# Altium PCB CT310高端控制盒核心板电路V1.3.PcbDoc (part 7 of 10)
Units mil, origin at the board's own origin, x right, y up, seen from the top; angles counter-clockwise.
Board outline 3735.76 x 4625 mil, 2 copper layers (TOP, BOTTOM), stack 10.4 mil thick; 198 components, 362 nets, 1085 pads, 352 vias.
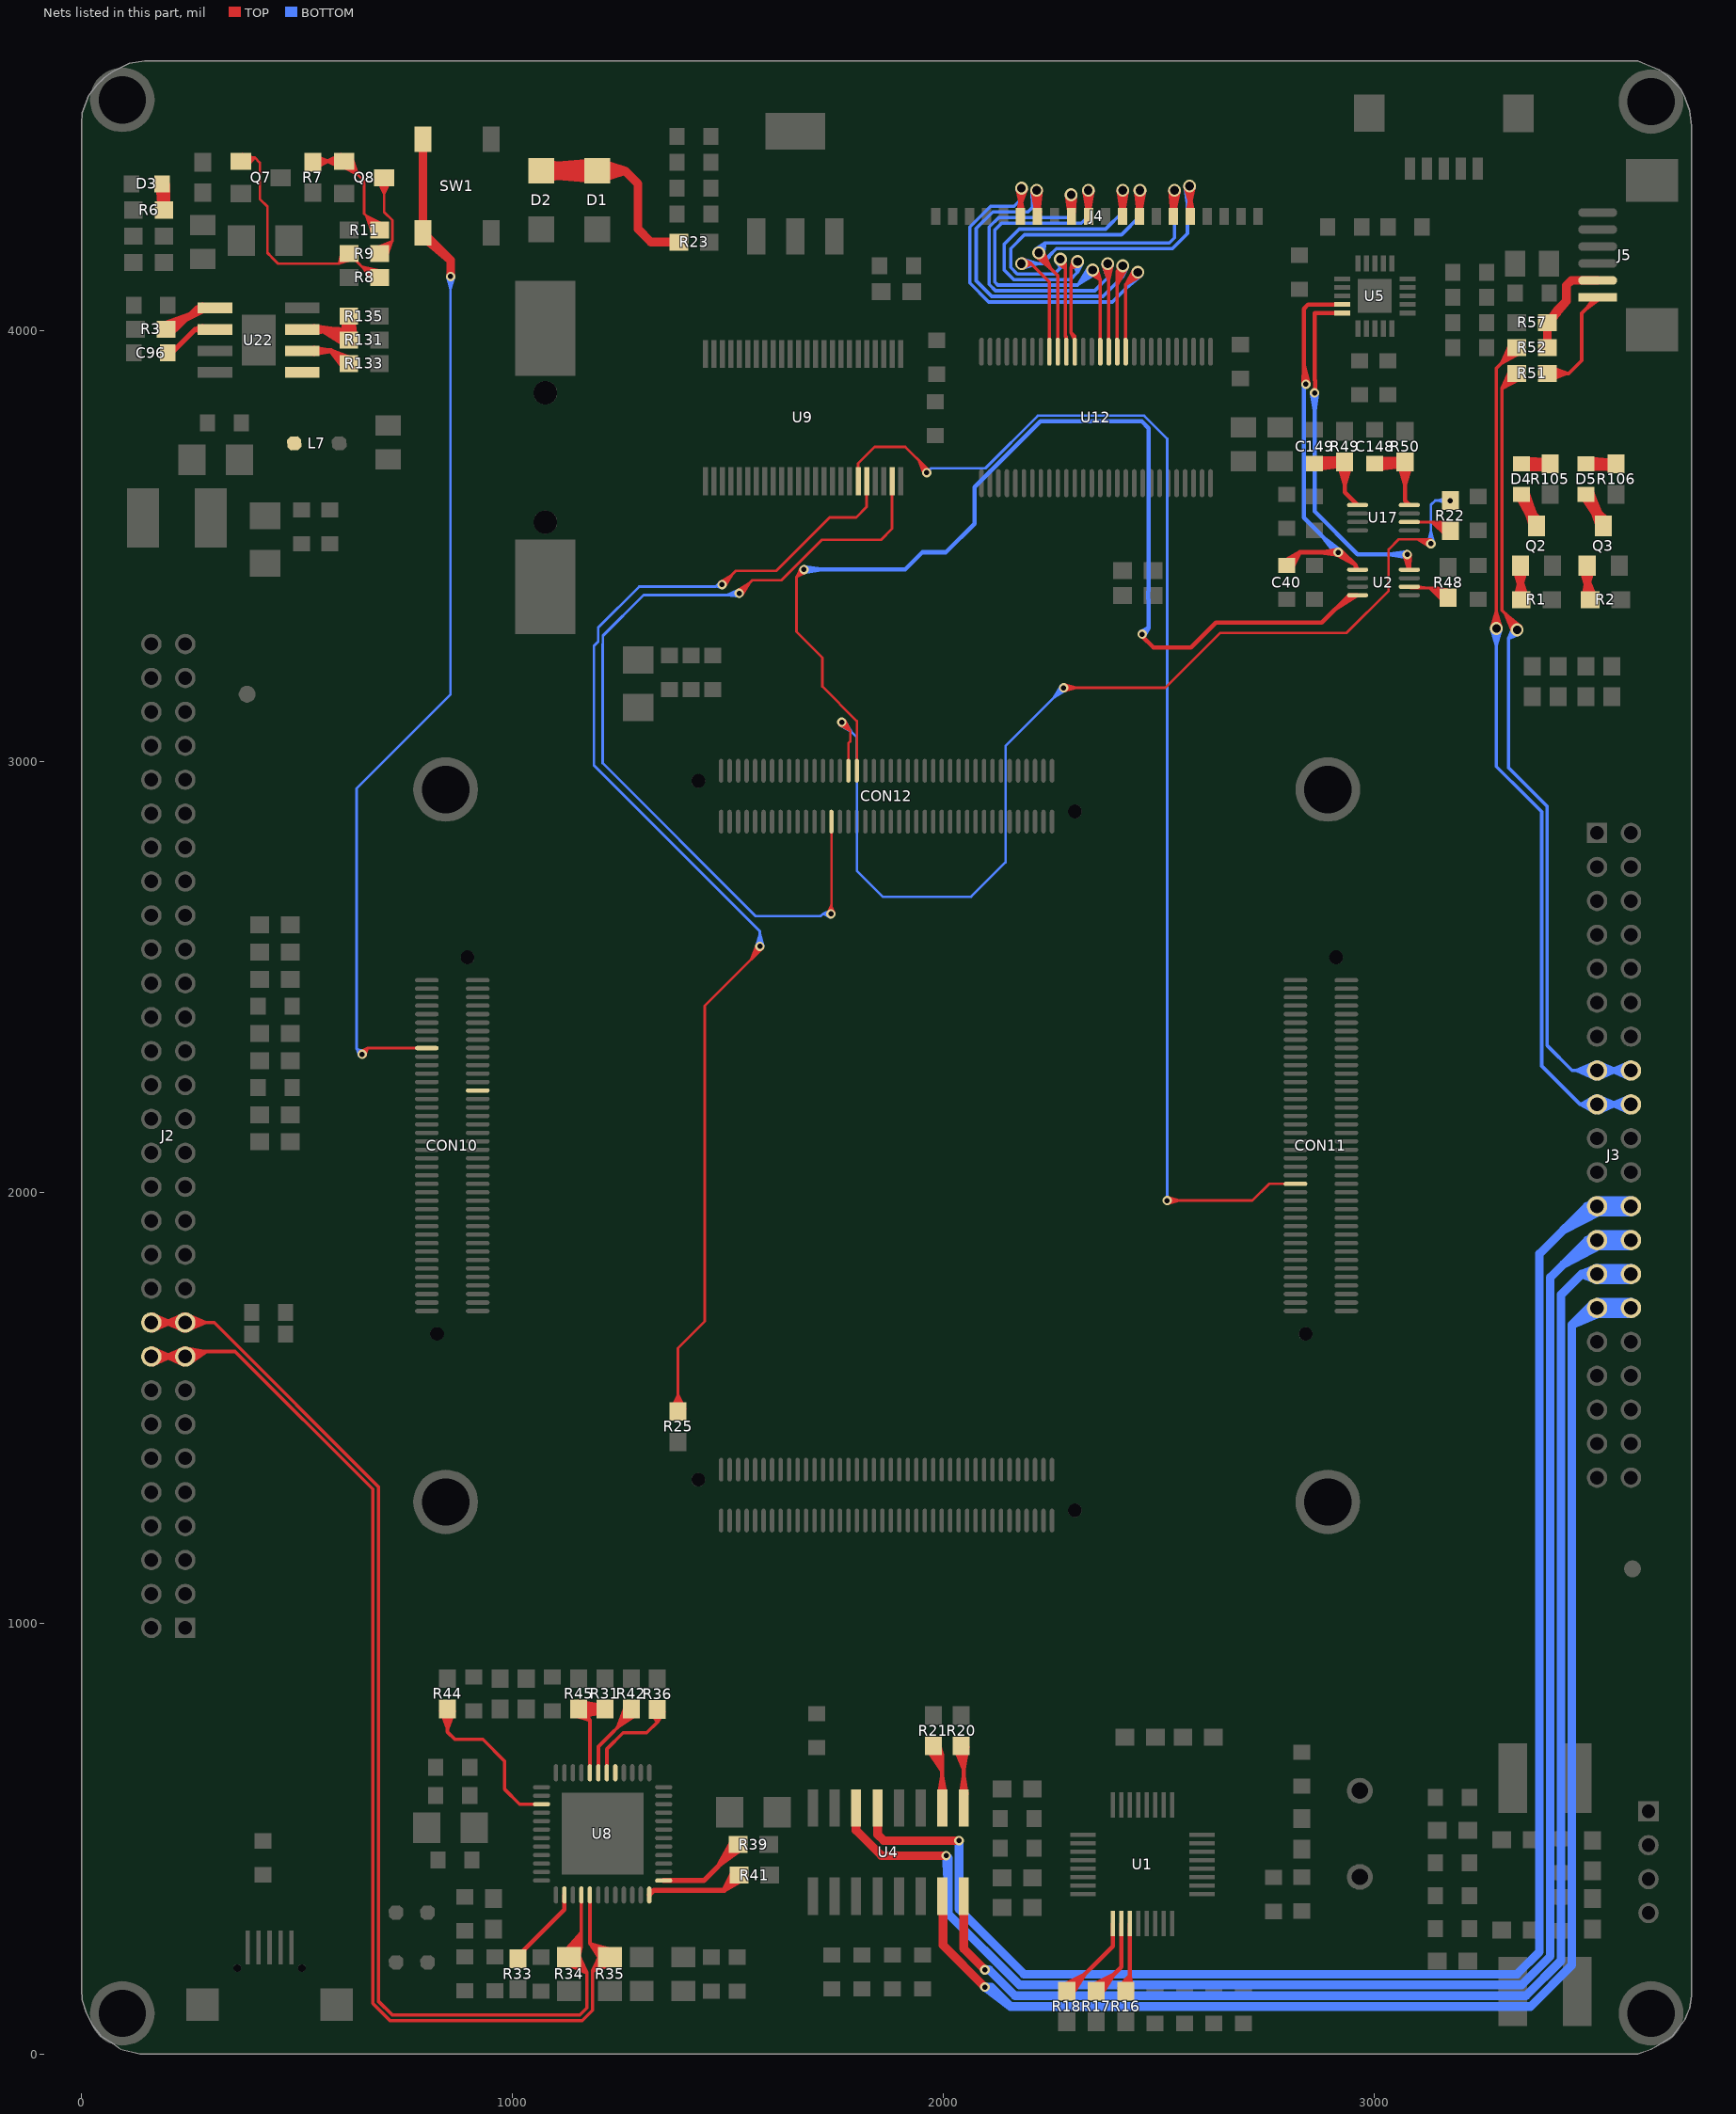
[diagram p7: the nets of this part, all layers, seen from the top]

## Via types
v1: diameter 22, hole 12, TOP to BOTTOM, tented both sides, 177 vias
v2: diameter 22, hole 12, TOP to BOTTOM, 89 vias
v3: diameter 28, hole 16, TOP to BOTTOM, 37 vias
v4: diameter 30, hole 20, TOP to BOTTOM, tented both sides, 26 vias
v5: diameter 24, hole 12, TOP to BOTTOM, 17 vias
v6: diameter 50, hole 30, TOP to BOTTOM, tented both sides, 5 vias
v7: diameter 40, hole 24, TOP to BOTTOM, 1 vias

## Nets (pads, with @x,y where several pads share a name; then routed paths per layer and width w, separated by ;. In a path a pad name is that pad's centre, name@x,y a point inside that pad or via, vN(x,y) a via of type N, cw(c..) or ccw(c..) an arc to the next point about the centre after c; other vN are vias at no path point) (continued)
NetC96_1: C96.1 U22.2 | length 192.9
  TOP w12: C96.1@192.19,3947.85 C96.1@195.87,3951.54 ; C96.1@199.56,3947.85 208.61,3947.85 263.11,4002.35 ; U22.2@280.49,3995.95 263.11,4002.35 ; U22.2@280.49,4008.75 263.11,4002.35 ; U22.2@281.63,4002.35 263.11,4002.35 ; U22.2@309.13,4002.35 263.11,4002.35
NetC148_1: C148.1 R50.1 U17.8 | length 1219.3
  TOP w10: C148.1@3000.76,3690.63 3066.82,3690.63 R50.1@3070.76,3694.57 3070.76,3604.57 U17.8@3080.8,3594.53 ; C148.1@3001.64,3703.3 R50.1@3051.15,3701.16 ; C148.1@3002.33,3677.92 3050.95,3682.76 ; C148.1@3004.11,3703.27 3050.46,3691.8 ; C148.1@3004.42,3678.03 3050.44,3690.63 ; C148.1@3004.42,3703.23 3050.44,3690.63 ; C148.1@3004.73,3678.07 3050.46,3691.8 ; C148.1@3006.39,3702.81 3050.95,3682.76 ; C148.1@3007,3678.65 R50.1@3051.15,3701.16 ; R50.1@3056.24,3690.43 3070.76,3642.91 ; R50.1@3068.03,3707.03 3020.82,3690.63 ; R50.1@3069.18,3678 3020.82,3690.63 ; R50.1@3085.28,3690.43 3070.76,3642.91 ; C148.1@3002.73,3690.63 3020.82,3690.63 ; C148.1@3002.73,3690.63 3050.46,3691.8 ; C148.1@3002.73,3690.63 3020.82,3690.63 ; C148.1@3002.73,3690.63 R50.1@3051.15,3701.16 ; C148.1@3002.73,3690.63 3020.82,3690.63 ; C148.1@3002.73,3690.63 3050.95,3682.76 ; C148.1@3002.73,3690.63 3050.44,3690.63 ; C148.1@3007.2,3678.72 3020.82,3690.63 ; C148.1@3007.2,3678.72 3020.82,3690.63 ; C148.1@3007.2,3678.72 3020.82,3690.63 ; C148.1@3007.2,3702.54 3020.82,3690.63 ; C148.1@3007.2,3702.54 3020.82,3690.63 ; C148.1@3007.2,3702.54 3020.82,3690.63 ; 3020.82,3690.63 3070.76,3692.6 3070.76,3642.91
NetC149_1: C149.1 R49.1 U17.1 | length 1028.3
  TOP w10: C149.1@2860.76,3690.63 2864.7,3694.57 R49.1@2930.76,3694.57 2930.76,3624.49 U17.1@2960.72,3594.53 2934.59,3620.67 ; C149.1@2861.05,3703.23 2909.65,3703.3 ; C149.1@2862.76,3677.91 R49.1@2914.38,3684.39 ; C149.1@2863.37,3703.33 2910.7,3694.57 ; C149.1@2865.43,3678.2 2910.7,3694.57 ; C149.1@2865.79,3702.97 R49.1@2914.38,3684.39 ; C149.1@2867.62,3678.89 2909.65,3703.3 ; R49.1@2916.24,3690.43 2930.76,3642.91 ; R49.1@2928.59,3680.04 2881.07,3694.57 ; R49.1@2928.59,3709.09 2881.07,3694.57 ; R49.1@2930.76,3692.6 2930.76,3642.91 ; R49.1@2945.28,3690.43 2930.76,3642.91 ; C149.1@2862.73,3690.63 2910.7,3694.57 ; C149.1@2862.73,3690.63 2881.07,3694.57 ; C149.1@2862.73,3690.63 2909.65,3703.3 ; C149.1@2862.73,3690.63 2881.07,3694.57 ; C149.1@2862.73,3690.63 R49.1@2914.38,3684.39 ; 2881.07,3694.57 2869.45,3679.84 2881.07,3694.57 ; 2881.07,3694.57 2864.43,3703.23 2881.07,3694.57
NetD1_2: D1.2 D2.2 R23.2 | length 1776.3
  TOP w20: D2.2@1065.76,4370.49 D1.2@1195.76,4370.49 ; D2.2@1067.98,4350.61 1155.76,4370.49 ; D2.2@1067.98,4390.36 1155.76,4370.49 ; D1.2@1191.1,4351.04 1103.99,4382.21 ; D1.2@1191.1,4389.94 1103.99,4358.77 ; D1.2@1193.54,4350.61 1105.76,4370.49 D1.2@1193.54,4390.36 ; D1.2@1196.13,4350.49 1103.99,4358.77 ; D1.2@1196.13,4390.48 1103.99,4382.21 ; D1.2@1198.86,4350.73 1260.27,4370.49 ; D1.2@1198.86,4390.25 1260.27,4370.49 ; R23.2@1365.33,4205 1320.76,4205 ; R23.2@1383.36,4205 1320.76,4205 ; 1103.99,4358.77 D1.2@1195.76,4370.49 ; 1103.99,4382.21 D1.2@1195.76,4370.49 ; 1155.76,4370.49 D1.2@1195.76,4370.49 ; 1155.76,4370.49 1190.76,4389.85 1155.76,4370.49 ; 1155.76,4370.49 1190.76,4351.12 1155.76,4370.49 ; 1155.76,4370.49 D1.2@1195.76,4370.49 ; D1.2@1195.76,4370.49 1260.27,4370.49 ; 1260.27,4370.49 1290.76,4340 1290.76,4235 1320.76,4205
NetD3_1: D3.1 R6.1 | length 115.7
  TOP w30: D3.1@186.19,4338.03 R6.1@190.62,4279.28 D3.1@190.62,4336.06
NetD4_1: D4.1 R105.1 | length 820.4
  TOP w10: D4.1@3330.76,3686.5 3403.49,3686.5 R105.1@3407.43,3690.43 ; D4.1@3341.14,3677.82 R105.1@3389.56,3678.12 ; D4.1@3342.16,3703.14 R105.1@3393.67,3699.07 ; D4.1@3343.37,3677.73 R105.1@3390.57,3686.5 ; D4.1@3343.71,3677.75 R105.1@3391.93,3687.85 ; D4.1@3345.03,3702.94 R105.1@3391.93,3687.85 ; D4.1@3345.44,3702.86 R105.1@3390.57,3686.5 ; D4.1@3346.38,3678.25 R105.1@3393.67,3699.07 ; D4.1@3347.55,3702.2 R105.1@3389.56,3678.12 ; R105.1@3404.7,3702.89 D4.1@3357.47,3686.5 ; R105.1@3405.84,3673.87 D4.1@3357.47,3686.5 ; R105.1@3407.43,3688.46 D4.1@3357.47,3686.5 ; D4.1@3342.73,3690.43 R105.1@3390.57,3686.5 ; D4.1@3342.73,3690.43 R105.1@3391.93,3687.85 ; D4.1@3342.73,3690.43 R105.1@3393.67,3699.07 ; D4.1@3342.73,3690.43 R105.1@3389.56,3678.12
NetD4_2: D4.2 Q2.3 | length 1167.5
  TOP w10: D4.2@3330.76,3615.63 3376.26,3570.13 ; D4.2@3330.89,3614.92 3354.18,3572.99 ; D4.2@3331.74,3613.17 3362.1,3573.66 ; D4.2@3332.92,3611.47 3370.76,3575.63 ; D4.2@3332.99,3611.4 3371.79,3575.02 ; D4.2@3354.13,3625.19 3371.79,3575.02 ; D4.2@3354.2,3625.05 3370.76,3575.63 ; D4.2@3354.98,3622.97 3362.1,3573.66 ; D4.2@3355.37,3620.94 3354.18,3572.99 ; Q2.3@3362.84,3544.23 3345.9,3600.49 ; Q2.3@3376.26,3546.25 3376.26,3570.13 ; Q2.3@3387.79,3559.29 3345.9,3600.49 ; D4.2@3331.57,3613.47 3345.9,3600.49 ; D4.2@3331.57,3613.47 3345.9,3600.49 ; D4.2@3331.57,3613.47 3345.9,3600.49 ; D4.2@3342.73,3619.57 3345.9,3600.49 ; D4.2@3342.73,3619.57 3362.1,3573.66 ; D4.2@3342.73,3619.57 3345.9,3600.49 ; D4.2@3342.73,3619.57 3371.79,3575.02 ; D4.2@3342.73,3619.57 3345.9,3600.49 ; D4.2@3342.73,3619.57 3354.18,3572.99 ; D4.2@3342.73,3619.57 3370.76,3575.63 ; 3345.9,3600.49 D4.2@3355.26,3617.42 ; 3345.9,3600.49 D4.2@3355.26,3617.42 ; 3345.9,3600.49 D4.2@3355.26,3617.42 ; 3345.9,3600.49 Q2.3@3376.26,3550.19 ; Q2.3@3376.26,3550.19 3376.26,3570.13 ; Q2.3@3376.26,3550.19 3376.26,3570.13 ; 3376.26,3570.13 3389.91,3555.59 3376.26,3570.13 ; 3376.26,3570.13 3362.61,3555.59 3376.26,3570.13
NetD5_1: D5.1 R106.1 | length 1044.2
  TOP w10: D5.1@3484.09,3686.5 3556.82,3686.5 R106.1@3560.76,3690.43 ; D5.1@3491.36,3677.79 3539.72,3678.95 ; D5.1@3492.41,3703.15 R106.1@3544.18,3698.08 ; D5.1@3493.37,3677.73 3540.59,3686.5 ; D5.1@3493.55,3677.74 R106.1@3560.76,3688.46 ; D5.1@3494.28,3703.05 R106.1@3560.76,3688.46 ; D5.1@3495.44,3702.86 3540.59,3686.5 ; D5.1@3496.12,3678.18 R106.1@3544.18,3698.08 ; D5.1@3497.35,3702.28 3539.72,3678.95 ; R106.1@3558.03,3702.89 3510.81,3686.5 ; R106.1@3559.18,3673.87 3510.81,3686.5 ; D5.1@3492.73,3690.43 3510.81,3686.5 ; D5.1@3492.73,3690.43 R106.1@3560.76,3688.46 ; D5.1@3492.73,3690.43 3510.81,3686.5 ; D5.1@3492.73,3690.43 R106.1@3544.18,3698.08 ; D5.1@3492.73,3690.43 3510.81,3686.5 ; D5.1@3492.73,3690.43 3539.72,3678.95 ; D5.1@3492.73,3690.43 3540.59,3686.5 ; D5.1@3494.46,3677.83 3510.81,3686.5 ; D5.1@3494.46,3677.83 3510.81,3686.5 ; D5.1@3494.46,3677.83 3510.81,3686.5 ; D5.1@3499.54,3701.17 3510.81,3686.5 ; D5.1@3499.54,3701.17 3510.81,3686.5 ; D5.1@3499.54,3701.17 3510.81,3686.5 ; 3510.81,3686.5 R106.1@3560.76,3688.46
NetD5_2: D5.2 Q3.3 | length 1056.2
  TOP w10: D5.2@3481.29,3614.01 3507.89,3573.78 ; D5.2@3482.22,3612.41 3515.28,3575.12 ; D5.2@3483.31,3611.03 3522.89,3576.83 ; D5.2@3483.48,3610.84 3524.46,3576.68 ; D5.2@3484.09,3615.63 3531.26,3568.46 Q3.3@3531.26,3546.25 ; D5.2@3503.78,3625.86 3524.46,3576.68 ; D5.2@3503.93,3625.58 3522.89,3576.83 ; D5.2@3504.71,3623.83 3515.28,3575.12 ; D5.2@3505.22,3621.94 3507.89,3573.78 ; Q3.3@3518.03,3543.82 3498.65,3601.08 ; Q3.3@3531.26,3550.19 3498.65,3601.08 ; Q3.3@3542.57,3559.55 3498.65,3601.08 ; D5.2@3482.55,3611.94 3498.65,3601.08 ; D5.2@3482.55,3611.94 3498.65,3601.08 ; D5.2@3482.55,3611.94 3498.65,3601.08 ; D5.2@3492.73,3619.57 3498.65,3601.08 ; D5.2@3492.73,3619.57 3515.28,3575.12 ; D5.2@3492.73,3619.57 3498.65,3601.08 ; D5.2@3492.73,3619.57 3524.46,3576.68 ; D5.2@3492.73,3619.57 3498.65,3601.08 ; D5.2@3492.73,3619.57 3507.89,3573.78 ; D5.2@3492.73,3619.57 3522.89,3576.83 ; 3498.65,3601.08 D5.2@3505.44,3619.26 ; 3498.65,3601.08 D5.2@3505.44,3619.26 ; 3498.65,3601.08 D5.2@3505.44,3619.26
NetJ5_1: J5.1 R51.2 | length 548.6
  TOP w8: R51.2@3401.19,3900 3450.76,3900 3480.76,3930 3480.76,4039.57 J5.1@3517.77,4076.57 ; R51.2@3403.16,3900 3446.85,3900 ; R51.2@3403.84,3892.34 3446.85,3900 ; R51.2@3403.84,3907.66 3446.85,3900 ; R51.2@3405.98,3884.57 3446.85,3900 ; R51.2@3405.98,3915.43 3446.85,3900 ; J5.1@3513.2,4080.47 3490.8,4049.6 J5.1@3521.66,4072.01
NetJ5_2: J5.2 R52.2 R57.1 | length 465.2
  TOP w20: R52.2@3401.19,3960 R57.1@3401.19,4018.33 3424.28,4041.42 ; J5.2@3482.77,4115.94 3456.7,4115.94 ; J5.2@3517.77,4115.94 3456.7,4115.94 ; R57.1@3403.16,4018.33 3424.28,4041.42 ; R57.1@3403.16,4018.33 3424.28,4041.42 ; R57.1@3403.16,4018.33 3424.28,4047.2 ; R57.1@3403.16,4018.33 3424.28,4047.2 ; R57.1@3403.16,4018.33 3445.13,4068.05 ; 3424.28,4041.42 3424.28,4047.2 ; 3424.28,4047.2 3445.13,4068.05 ; 3445.13,4068.05 3445.13,4104.37 3456.7,4115.94
NetL7_1: L7.1 U22.5
NetQ2_1: Q2.1 R1.1 | length 378
  TOP w10: Q2.1@3323.74,3447.64 3338.26,3400.13 ; R1.1@3325.73,3376.56 3338.26,3424.75 ; Q2.1@3338.26,3449.81 3338.26,3400.13 ; Q2.1@3338.26,3453.75 3338.26,3377.07 R1.1@3340.33,3375 3338.26,3424.75 ; Q2.1@3352.78,3447.64 3338.26,3400.13 ; R1.1@3354.75,3377.77 3338.26,3424.75
NetQ3_1: Q3.1 R2.1 | length 383.8
  TOP w10: Q3.1@3478.74,3447.64 3493.26,3400.13 ; R2.1@3483.69,3375.65 3493.26,3425.75 ; Q3.1@3493.26,3449.81 3493.26,3400.13 ; Q3.1@3493.26,3453.75 3493.26,3382.07 R2.1@3500.33,3375 ; R2.1@3498.36,3375 3493.26,3425.75 ; Q3.1@3507.78,3447.64 3493.26,3400.13 ; R2.1@3512.61,3378.56 3493.26,3425.75
NetQ7_1: Q7.1 R8.2 R9.1 | length 1321.1
  TOP w6: Q7.1@369.19,4400.85 401.81,4400.85 ; Q7.1@372.02,4403.13 401.81,4400.85 ; Q7.1@372.17,4397.09 401.81,4400.85 ; Q7.1@373.13,4392.5 401.81,4400.85 ; Q7.1@373.12,4409.19 401.81,4400.85 ; Q7.1@374.78,4388.12 401.81,4400.85 ; Q7.1@377.9,4382.94 401.81,4400.85 ; Q7.1@382.08,4378.42 401.81,4400.85 ; R9.1@603.14,4185.37 597.15,4155 ; R9.1@609.02,4183.59 597.15,4155 ; R9.1@614.35,4180.74 597.15,4155 ; R9.1@618.04,4177.85 597.15,4155 ; R9.1@621.25,4174.44 597.15,4155 ; R9.1@624.56,4169.39 597.15,4155 ; R9.1@626.87,4163.7 597.15,4155 ; R8.2@677.49,4110.68 649.71,4148.15 ; R8.2@682.12,4114.6 649.71,4148.15 ; R8.2@686.17,4119.05 649.71,4148.15 ; R8.2@688.9,4122.85 649.71,4148.15 ; R8.2@690.87,4122.85 675.01,4122.85 R9.1@620.01,4177.85 597.15,4155 ; R8.2@691.24,4126.91 649.71,4148.15 ; R8.2@693.63,4132.44 649.71,4148.15 ; R8.2@695.3,4138.26 649.71,4148.15 ; 401.81,4400.85 413.19,4389.48 413.19,4305 430.76,4287.43 430.76,4180 440.81,4169.95 440.81,4169.11 454.92,4155 597.15,4155
NetQ8_1: Q8.1 R7.1 R11.1 | length 1389.5
  TOP w6: R7.1@535.79,4395.12 573.51,4392.5 ; R7.1@536.31,4385.78 573.51,4392.5 ; R7.1@536.69,4401.08 573.51,4392.5 ; R7.1@537.85,4379.95 573.51,4392.5 ; R7.1@538.55,4406.88 573.51,4392.5 ; R7.1@540.33,4374.38 573.51,4392.5 ; Q8.1@601.56,4376.23 567.57,4392.5 ; Q8.1@601.56,4408.77 567.57,4392.5 ; Q8.1@602.95,4379.27 641.59,4360.08 ; Q8.1@603.74,4381.92 567.57,4392.5 ; Q8.1@603.74,4403.08 567.57,4392.5 ; Q8.1@604.96,4387.82 567.57,4392.5 ; Q8.1@604.96,4397.18 567.57,4392.5 ; Q8.1@605.25,4392.5 567.57,4392.5 ; Q8.1@606.03,4384.51 641.59,4360.08 ; Q8.1@609.19,4392.5 537.83,4392.5 R7.1@535.76,4390.43 573.51,4392.5 ; Q8.1@609.78,4389.22 641.59,4360.08 ; Q8.1@613.13,4392.5 641.59,4360.08 ; Q8.1@616.81,4395.4 641.59,4360.08 ; Q8.1@620.01,4381.67 655.04,4346.63 655.04,4270.72 690.87,4234.89 R11.1@690.87,4232.85 ; Q8.1@621.97,4398.5 641.59,4360.08 ; Q8.1@627.56,4400.88 641.59,4360.08 ; R11.1@674.5,4224.43 660,4265.76 ; R11.1@680.08,4226.83 660,4265.76 ; R11.1@685.22,4229.95 660,4265.76 ; R11.1@688.9,4232.85 660,4265.76 ; R11.1@692.25,4236.13 660,4265.76 ; R11.1@696.01,4240.83 660,4265.76 ; R11.1@699.11,4246.05 660,4265.76
NetQ8_3: Q8.3 R9.2 | length 815.1
  TOP w6: R9.2@683.25,4191.5 720.53,4207.51 ; Q8.3@685.42,4350.81 701.69,4316.81 ; R9.2@686.06,4186.11 720.53,4207.51 ; Q8.3@686.29,4348.07 701.69,4332.85 ; R9.2@689.61,4181.24 720.53,4207.51 ; R9.2@690.87,4177.85 720.53,4207.51 ; Q8.3@691.11,4352.99 701.69,4316.81 ; Q8.3@691.33,4351.86 701.69,4332.85 ; R9.2@692.84,4177.85 720.53,4207.51 ; R9.2@696.44,4174.86 720.53,4207.51 ; Q8.3@697.03,4353.99 701.69,4332.85 ; Q8.3@697.01,4354.21 701.69,4316.81 ; R9.2@701.54,4171.65 720.53,4207.51 ; Q8.3@706.35,4353.99 701.69,4332.85 ; Q8.3@706.36,4354.21 701.69,4316.81 ; R9.2@707.12,4169.22 720.53,4207.51 ; Q8.3@712.04,4351.86 701.69,4332.85 ; Q8.3@712.27,4352.99 701.69,4316.81 ; Q8.3@717.08,4348.07 701.69,4332.85 ; Q8.3@717.96,4350.81 701.69,4316.81 ; 701.69,4332.85 701.69,4274.69 720.53,4255.85 720.53,4219.77 720.53,4207.51
NetR3_2: R3.2 U22.1 | length 688.9
  TOP w12: R3.2@191.68,4015.2 252.5,4036.74 ; R3.2@192.19,4002.85 R3.2@193.91,4004.57 ; R3.2@195.62,4002.85 218.61,4002.85 ; R3.2@205.97,3992.04 252.5,4036.74 ; U22.1@277.65,4057.49 239.77,4024.01 ; U22.1@284.92,4046.75 239.77,4024.01 ; U22.1@309.13,4052.35 268.11,4052.35 ; R3.2@197.59,4002.85 218.61,4002.85 ; R3.2@197.59,4002.85 252.5,4036.74 ; R3.2@197.59,4002.85 218.61,4002.85 ; 218.61,4002.85 202.04,3989.91 218.61,4002.85 ; 218.61,4002.85 202.04,4015.79 218.61,4002.85 ; 218.61,4002.85 268.11,4052.35 ; 239.77,4024.01 U22.1@281.63,4052.35 ; 268.11,4052.35 U22.1@281.63,4052.35 ; 268.11,4052.35 280.07,4058.66 268.11,4052.35 ; 268.11,4052.35 280.07,4046.04 268.11,4052.35 ; 268.11,4052.35 U22.1@281.63,4052.35
NetR16_2: R16.2 U1.27 | length 446.9
  TOP w10: R16.2@2409.45,154.27 2432.04,181.28 ; R16.2@2422.43,145.43 2422.43,171.67 ; 2432.04,242.68 U1.27@2432.04,277.6 ; U1.27@2432.04,302.2 2432.04,181.28 ; R16.2@2437.08,146.43 2432.04,181.28 ; R16.2@2422.43,147.4 2422.43,171.67 ; R16.2@2422.43,147.4 2422.43,171.67 ; R16.2@2422.43,147.4 2432.04,181.28 ; 2422.43,171.67 2436.42,151.85 2422.43,171.67 ; 2422.43,171.67 2408.43,151.85 2422.43,171.67 ; 2422.43,171.67 2432.04,181.28
NetR17_1: R17.1 U1.26 | length 385.2
  TOP w10: R17.1@2345.77,159.5 2395.7,184.94 ; R17.1@2354.09,145.43 2356.19,145.43 2412.35,201.59 U1.26@2412.35,302.2 ; R17.1@2354.09,147.4 2395.7,184.94 ; R17.1@2365.27,137.88 2395.7,184.94 ; 2412.35,242.68 U1.26@2412.35,277.6
NetR18_1: R18.1 U1.25 | length 398.8
  TOP w10: R18.1@2277.47,159.52 2327.65,184.96 ; R18.1@2285.76,145.43 2288.12,145.43 2392.67,249.98 ; R18.1@2285.76,147.4 2327.65,184.96 ; R18.1@2296.91,137.84 2327.65,184.96 ; U1.25@2392.67,277.6 2392.67,249.98 ; U1.25@2392.67,302.2 2392.67,249.98
NetR20_2: R20.2 U4.9 | length 424.3
  TOP w10: R20.2@2026.58,708.79 2046.72,662.12 ; U4.9@2039.93,602.72 2046.72,643.98 ; R20.2@2040.76,712.6 2046.72,662.12 ; R20.2@2040.76,714.57 2046.72,708.61 U4.9@2046.72,570.67 ; U4.9@2046.72,602.17 2046.72,643.98 ; U4.9@2053.51,602.72 2046.72,643.98 ; R20.2@2055.44,712.2 2046.72,662.12
NetR21_2: R21.2 U4.10 | length 627.3
  TOP w10: R21.2@1962.74,705.81 1996.72,656.53 ; R21.2@1975.76,714.57 1996.72,693.61 ; U4.10@1989.93,602.72 1996.72,643.98 ; R21.2@1990.04,716.01 1996.72,656.53 ; U4.10@1996.72,570.67 1996.72,693.61 ; U4.10@1996.72,602.17 1996.72,643.98 ; U4.10@2003.51,602.72 1996.72,643.98 ; R21.2@1975.76,712.6 1996.72,693.61 ; R21.2@1975.76,712.6 1996.72,656.53 ; R21.2@1975.76,712.6 1996.72,693.61 ; 1996.72,693.61 1969.06,699.53 1996.72,693.61 ; 1996.72,693.61 1988.11,720.55 1996.72,693.61
NetR22_2: R22.2 U17.6 | length 846.9
  TOP w6: U17.6@3080.8,3555.16 3155.17,3555.16 ; U17.6@3100.48,3555.16 3123.41,3555.16 ; R22.2@3166.6,3522.59 3132.19,3555.16 ; R22.2@3170.48,3527.25 3132.19,3555.16 ; R22.2@3173.71,3532.32 3132.19,3555.16 ; R22.2@3175.76,3534.57 3155.17,3555.16 ; R22.2@3177.39,3540.93 3132.19,3555.16 ; R22.2@3178.83,3546.77 3132.19,3555.16 ; R22.2@3179.51,3552.79 3132.19,3555.16 ; 3132.19,3555.16 R22.2@3175.76,3536.54 ; 3155.17,3555.16 R22.2@3175.76,3536.54 ; 3155.17,3555.16 3178.6,3540.26 3155.17,3555.16 ; 3155.17,3555.16 3172.34,3533.34 3155.17,3555.16 ; 3155.17,3555.16 3181.27,3545.69 3155.17,3555.16 ; 3155.17,3555.16 3167.2,3530.14 3155.17,3555.16 ; 3155.17,3555.16 3182.72,3551.7 3155.17,3555.16 ; 3155.17,3555.16 3161.37,3528.09 3155.17,3555.16 ; 3155.17,3555.16 R22.2@3175.76,3536.54
NetR25_1: R25.1 U9.44 | length 3439.2
  TOP w6: R25.1@1367.34,1496.67 1383.61,1530.66 ; R25.1@1373.04,1494.49 1383.61,1530.66 ; R25.1@1378.94,1493.26 1383.61,1530.66 ; R25.1@1383.61,1472.07 1383.61,1637.85 1445.76,1700 1445.76,2432.16 1573.61,2560.01 v2(1573.61,2570.57) 1553.69,2540.1 ; R25.1@1383.61,1492.97 1383.61,1530.66 ; R25.1@1388.29,1493.26 1383.61,1530.66 ; R25.1@1394.19,1494.49 1383.61,1530.66 ; R25.1@1399.88,1496.67 1383.61,1530.66 ; v1@1480.82,3416.29 1509.49,3433.73 v1@1492.05,3405.06 ; 1493.76,3418 1517.76,3442 1611.4,3442 1735.51,3566.11 1796.87,3566.11 1821.26,3590.5 U9.44@1821.26,3650 ; v2@1566.48,2574.19 1553.69,2540.1 ; v2@1579.79,2565.48 1553.69,2540.1 ; 1821.26,3599.5 U9.44@1821.26,3623.5
  BOTTOM w6: v1@1481.47,3416.75 1471.33,3405.57 ; v1@1486,3402 1471.33,3405.57 ; v2@1565.69,2571.67 1573.61,2599.57 v2@1581.54,2571.67 ; v2(1573.61,2570.57) 1573.61,2605.57 1188.61,2990.57 1188.61,3267.65 1198.26,3277.29 1198.26,3310.22 1293.61,3405.57 1471.33,3405.57 ; 1471.33,3405.57 v1(1485.76,3410) 1480.76,3415 1471.33,3405.57
NetR31_1: R31.1 R45.1 U8.32 | length 1939.9
  TOP w8: R45.1@1145.25,784.58 1179.09,774.13 ; R45.1@1148.51,791.99 1179.09,774.13 ; R45.1@1152.28,790.53 R31.1@1198.15,789.62 ; R45.1@1152.28,809.75 R31.1@1198.15,810.66 ; R45.1@1152.83,782.49 R31.1@1198.15,789.62 ; R45.1@1152.83,817.79 R31.1@1198.15,810.66 ; R45.1@1153.25,790.49 R31.1@1197.38,795.32 ; R45.1@1153.25,809.79 R31.1@1197.38,804.96 ; R45.1@1154.24,794.51 R31.1@1197.38,804.96 ; R45.1@1154.24,805.77 R31.1@1197.38,795.32 ; R45.1@1154.85,782.58 R31.1@1197.38,795.32 ; R45.1@1154.85,817.69 R31.1@1197.38,804.96 ; R45.1@1155.14,794.7 R31.1@1198.15,810.66 ; R45.1@1155.14,805.57 R31.1@1198.15,789.62 ; R45.1@1156.84,786.88 R31.1@1197.38,804.96 ; R45.1@1156.84,813.4 R31.1@1197.38,795.32 ; R45.1@1158.59,787.42 R31.1@1198.15,810.66 ; R45.1@1158.59,812.85 R31.1@1198.15,789.62 ; R45.1@1158.88,803.21 1179.09,774.13 ; R45.1@1166.01,807.04 1179.09,774.13 ; U8.32@1179.09,652.3 1179.09,774.13 ; U8.32@1179.09,667.3 1179.09,696.3 ; R31.1@1211.16,784.71 R45.1@1170.29,800.14 ; R31.1@1211.16,815.57 R45.1@1170.29,800.14 ; R31.1@1213.3,792.48 R45.1@1170.29,800.14 ; R31.1@1213.3,807.79 R45.1@1170.29,800.14 ; R45.1@1153.08,798.17 R31.1@1197.38,795.32 ; R45.1@1153.08,798.17 R31.1@1198.15,789.62 ; R45.1@1153.08,798.17 1179.09,774.13 ; R45.1@1153.08,800.14 R31.1@1196.76,800.14 ; R45.1@1153.08,800.14 R31.1@1213.97,800.14 R45.1@1170.29,800.14 ; R45.1@1153.08,800.14 1179.09,774.13 ; R31.1@1196.76,800.14 1153.76,792.48 R31.1@1196.76,800.14 ; R31.1@1196.76,800.14 1153.76,807.79 R31.1@1196.76,800.14 ; R31.1@1196.76,800.14 1155.9,784.71 R31.1@1196.76,800.14 ; R31.1@1196.76,800.14 1155.9,815.57 R31.1@1196.76,800.14 ; R31.1@1197.38,804.96 1153.08,802.11 R31.1@1198.15,810.66
NetR33_1: R33.1 U8.2 | length 210.3
  TOP w10: R33.1@1008.61,223.57 1120.03,334.99 ; U8.2@1120.03,353.84 1120.03,334.99 ; U8.2@1120.03,368.84 1120.03,334.99
NetR36_2: R36.2 U8.30 | length 394.9
  TOP w8: U8.30@1218.46,652.3 1218.46,707.38 1256.07,745 1310.76,745 1335.76,770 ; U8.30@1218.46,667.3 1218.46,696.3 ; R36.2@1320.72,793.14 1335.76,770 ; R36.2@1328.15,796.53 1335.76,770 ; R36.2@1335.76,797.6 1335.76,770 ; R36.2@1335.76,799.57 1335.76,770 ; R36.2@1343.37,796.53 1335.76,770 ; R36.2@1350.8,793.14 1335.76,770
NetR39_2: R39.2 U8.13 | length 418.4
  TOP w12: U8.13@1350.35,402.3 1443.06,402.3 R39.2@1512.47,471.71 ; U8.13@1365.35,402.3 1406.35,402.3 ; R39.2@1510.05,493.49 1479.89,439.13 ; R39.2@1521.21,485.57 1479.89,439.13 ; R39.2@1530.37,475.4 1479.89,439.13
NetR41_2: R41.2 U8.12 | length 369.5
  TOP w12: U8.12@1316.88,368.84 1328.04,380 1490.76,380 ; R41.2@1512.11,422.8 1490.76,380 ; R41.2@1523.36,415 1490.76,380 ; R41.2@1524.33,413.57 1490.76,380 ; R41.2@1531.94,404.34 1490.76,380
NetR42_2: R42.2 U8.31 | length 470.8
  TOP w8: U8.31@1198.77,652.3 1198.77,713.01 1274.87,789.11 R42.2@1274.87,800.14 ; U8.31@1198.77,667.3 1198.77,696.3 ; R42.2@1261.2,805.87 1242.56,756.8 ; R42.2@1268.48,802.44 1242.56,756.8 ; R42.2@1274.87,798.17 1242.56,756.8 ; R42.2@1280.56,793.01 1242.56,756.8 ; R42.2@1285.65,786.78 1242.56,756.8
NetR44_2: R44.2 U8.39 | length 611.2
  TOP w8: R44.2@833.18,795.35 848.61,754.48 ; R44.2@840.96,797.49 848.61,754.48 ; R44.2@848.61,798.17 848.61,754.48 ; R44.2@848.61,800.14 848.61,747.15 865.76,730 930.76,730 980.76,680 980.76,615 1016.29,579.47 1045.76,579.47 1051.88,579.47 1022.88,579.47 ; R44.2@856.27,797.49 848.61,754.48 ; R44.2@864.04,795.35 848.61,754.48
NetR48_2: R48.2 U2.6 | length 890.1
  TOP w6: U2.6@3080.8,3405.16 3083.96,3402 3148.33,3402 ; U2.6@3100.48,3405.16 3123.5,3402 ; R48.2@3161.27,3367.81 3126.52,3402 ; R48.2@3165.24,3372.39 3126.52,3402 ; R48.2@3168.59,3377.38 3126.52,3402 ; R48.2@3170.76,3379.57 3148.33,3402 ; R48.2@3172.52,3385.88 3126.52,3402 ; R48.2@3174.16,3391.67 3126.52,3402 ; R48.2@3175.07,3397.65 3126.52,3402 ; 3126.52,3402 R48.2@3170.76,3381.54 ; 3148.33,3402 R48.2@3170.76,3381.54 ; 3148.33,3402 3173.64,3385.23 3148.33,3402 ; 3148.33,3402 3167.34,3378.33 3148.33,3402 ; 3148.33,3402 3176.46,3390.57 3148.33,3402 ; 3148.33,3402 3162.28,3375.03 3148.33,3402 ; 3148.33,3402 3178.19,3396.48 3148.33,3402 ; 3148.33,3402 3156.56,3372.77 3148.33,3402 ; 3148.33,3402 R48.2@3170.76,3381.54
NetR131_2: R131.2 R135.1 U22.7 | length 1954.4
  TOP w8: R131.2@602.12,3977.04 R135.1@607.68,4021.16 ; R131.2@602.17,3979.32 R135.1@614,4021.48 ; R131.2@604.33,3980.67 R135.1@619.76,4021.54 ; R135.1@604.33,4030.04 R131.2@619.76,3989.17 ; R131.2@606.59,3981.99 R135.1@625.51,4021.48 ; R131.2@607.32,3984.06 R135.1@631.83,4021.16 ; R131.2@610.1,3977.86 R135.1@614,4021.48 ; R131.2@610.18,3976.76 R135.1@607.68,4021.16 ; R131.2@612.1,3978.53 R135.1@619.76,4021.54 ; R135.1@612.1,4032.18 R131.2@619.76,3989.17 ; R131.2@614.16,3979.19 R135.1@625.51,4021.48 ; R131.2@614.42,3980.24 R135.1@631.83,4021.16 ; R131.2@619.76,3977.85 R135.1@619.76,4032.85 ; R131.2@625.09,3980.24 R135.1@607.68,4021.16 ; R131.2@625.36,3979.19 R135.1@614,4021.48 ; R131.2@627.41,3978.53 R135.1@619.76,4021.54 ; R135.1@627.41,4032.18 R131.2@619.76,3989.17 ; R131.2@629.33,3976.76 R135.1@631.83,4021.16 ; R131.2@629.41,3977.86 R135.1@625.51,4021.48 ; R131.2@632.19,3984.06 R135.1@607.68,4021.16 ; R131.2@632.92,3981.99 R135.1@614,4021.48 ; R131.2@635.19,3980.67 R135.1@619.76,4021.54 ; R135.1@635.19,4030.04 R131.2@619.76,3989.17 ; R131.2@637.34,3979.32 R135.1@625.51,4021.48 ; R131.2@637.39,3977.04 R135.1@631.83,4021.16 ; R135.1@607.68,4021.16 617.79,3977.85 R135.1@614,4021.48 ; R135.1@625.51,4021.48 621.72,3977.85 R135.1@631.83,4021.16
  TOP w12: U22.7@511.25,4002.35 595.26,4002.35 ; U22.7@538.75,4002.35 587.25,4002.35 ; U22.7@539.18,3995.87 587.25,4002.35 ; U22.7@539.18,4008.84 587.25,4002.35 ; R131.2@611.58,3965.66 554.54,4002.35 ; R131.2@619.76,3977.85 595.26,4002.35 ; R131.2@621.42,3991.05 554.54,4002.35 ; 554.54,4002.35 R131.2@617.79,3977.85 ; 595.26,4002.35 R131.2@617.79,3977.85 ; 595.26,4002.35 625.74,3988.99 595.26,4002.35 ; 595.26,4002.35 606.03,3970.86 595.26,4002.35 ; 595.26,4002.35 R131.2@617.79,3977.85
NetR133_1: R133.1 U22.6 | length 407.1
  TOP w12: U22.6@511.25,3952.35 578.41,3952.35 ; U22.6@538.75,3952.35 578.41,3952.35 ; U22.6@539.28,3945.88 578.41,3952.35 ; U22.6@539.28,3958.83 578.41,3952.35 ; R133.1@605.26,3937.35 R133.1@619.76,3922.85 ; R133.1@608.14,3913.15 578.41,3952.35 ; R133.1@615.76,3915 578.41,3952.35 ; R133.1@617.79,3922.85 578.41,3952.35 ; R133.1@624.39,3934.84 578.41,3952.35
PWRDN_VCM: CON11.50 U9.43 | length 3164.6
  TOP w6: U9.43@1801.56,3650 1801.56,3691.5 ; U9.43@1801.56,3676.5 1801.56,3691.5 ; v1@1953.62,3666.4 1941.52,3699.24 ; v1@1966.9,3675.13 1941.52,3699.24 ; v2(2518.61,1980.57) 2716.64,1980.57 2755.39,2019.31 CON11.50@2816.4,2019.31 ; v2@2519.72,1972.65 2547.61,1980.57 v2@2519.72,1988.49 ; 2770.9,2019.31 CON11.50@2793.9,2019.31 ; 1801.56,3691.5 1839.7,3729.64 1911.12,3729.64 1960.76,3680 v1(1960.76,3670) 1941.52,3699.24
  BOTTOM w6: v1(1960.76,3670) 1970.76,3680 2096.87,3680 2218.87,3802 2465.22,3802 2518.61,3748.61 v2(2518.61,1980.57)
PWRON: CON10.63 SW1.3 SW1.4 | length 2817.8
  TOP w6: v2@646.07,2326.48 663.68,2334.28 ; v2@649.4,2320 663.68,2334.28 ; v2(650.76,2320) 663.68,2334.28 ; v2@657.68,2315.98 663.68,2334.28 ; 755.16,2334.28 CON10.63@778.16,2334.28 ; CON10.63@800.66,2334.28 663.68,2334.28
  TOP w20: SW1.4@792.02,4216.89 854.13,4164.62 ; SW1.4@792.02,4236.57 792.02,4316.26 ; 792.02,4353.74 SW1.3@792.02,4433.43 ; SW1.3@792.02,4443.27 SW1.4@792.02,4226.73 855.76,4162.99 v1(855.76,4125)
  BOTTOM w6: v2@643.99,2315.73 637.97,2332.79 ; v2(650.76,2320) 637.97,2332.79 ; v2@655.03,2326.77 637.97,2332.79 ; v1@847.84,4123.9 855.76,4096 v1@863.68,4123.9 ; v1(855.76,4125) 855.76,3155 637.97,2937.21 637.97,2332.79
RS232_RXD1: J3.23 J3.24 U4.13 | length 4748.1
  TOP w20: U4.13@1846.72,539.18 1846.72,509.04 ; U4.13@1846.72,570.67 1846.72,509.04 ; v1(2035.76,495) 1860.76,495 1846.72,509.04
  BOTTOM w20: 2035.76,424 v1(2035.76,495) 2035.76,335.71 2186.47,185 3330.76,185 3382.77,237.01 3382.77,1857.01 3493.07,1967.31 J3.23@3516.39,1967.31 ; J3.23@3507.77,1977.86 3436.85,1911.09 ; J3.23@3523.46,1955.66 3436.85,1911.09 ; J3.24@3591.63,1954.14 J3.23@3517.57,1980.88 ; J3.24@3591.63,1980.47 J3.23@3517.57,1953.74 ; J3.24@3593.95,1953.74 J3.23@3516.39,1967.31 ; J3.24@3593.95,1980.88 J3.23@3516.39,1967.31 ; J3.24@3596.31,1953.74 J3.23@3517.57,1953.74 ; J3.24@3596.31,1980.88 J3.23@3517.57,1980.88 ; 3436.85,1911.09 J3.23@3516.39,1967.31 ; J3.23@3516.39,1967.31 J3.24@3595.13,1967.31 ; J3.23@3517.57,1953.74 J3.24@3595.13,1967.31 ; J3.23@3517.57,1980.88 J3.24@3595.13,1967.31
RS232_RXD2: J3.27 J3.28 U4.8 | length 4429.4
  TOP w20: 2046.72,262.64 U4.8@2046.72,334.45 ; U4.8@2046.72,365.95 2046.72,244.04 ; 2046.72,244.04 v1(2095.76,195) 2046.72,244.04
  BOTTOM w20: v1(2095.76,195) 2105.76,195 2165.76,135 3351.47,135 3432.77,216.3 3432.77,1762.01 3480.59,1809.83 ; J3.27@3513.8,1796.46 3480.59,1809.83 ; J3.27@3513.8,1823.2 3480.59,1809.83 ; J3.28@3591.63,1796.66 J3.27@3517.57,1823.4 ; J3.28@3591.63,1822.99 J3.27@3517.57,1796.26 ; J3.28@3593.95,1796.26 J3.27@3516.39,1809.83 ; J3.28@3593.95,1823.4 J3.27@3516.39,1809.83 ; J3.28@3596.31,1796.26 J3.27@3517.57,1796.26 ; J3.28@3596.31,1823.4 J3.27@3517.57,1823.4 ; 3480.59,1809.83 J3.27@3516.39,1809.83 ; 3480.59,1809.83 J3.27@3516.39,1809.83 ; J3.27@3516.39,1809.83 J3.28@3595.13,1809.83 ; J3.27@3516.39,1809.83 J3.28@3595.13,1809.83 ; J3.27@3517.57,1796.26 J3.28@3595.13,1809.83 ; J3.27@3517.57,1796.26 J3.28@3595.13,1809.83 ; J3.27@3517.57,1823.4 J3.28@3595.13,1809.83 ; J3.27@3517.57,1823.4 J3.28@3595.13,1809.83
RS232_TXD1: J3.25 J3.26 U4.14 | length 5051
  TOP w20: U4.14@1796.72,570.67 1796.72,519.04 ; 1934.76,460 v1(2005.76,460) 1855.76,460 1796.72,519.04 ; 1796.72,519.04 1796.72,539.18 1796.72,519.04
  BOTTOM w20: 2010.76,387.44 v1(2005.76,460) 2010.76,455 2010.76,325.36 2176.12,160 3341.12,160 3407.77,226.65 3407.77,1802.01 3494.33,1888.57 J3.25@3516.39,1888.57 ; J3.25@3507.69,1899.05 3438.55,1832.79 ; J3.25@3515.21,1875 J3.26@3593.95,1875 ; J3.25@3515.21,1902.14 J3.26@3593.95,1902.14 ; J3.25@3519.89,1875.4 J3.26@3593.95,1902.14 ; J3.25@3519.89,1901.73 J3.26@3593.95,1875 ; J3.25@3523.52,1876.96 3438.55,1832.79 ; 3438.55,1832.79 J3.25@3516.39,1888.57 ; J3.25@3516.39,1888.57 J3.26@3595.13,1888.57 ; J3.25@3516.39,1888.57 J3.26@3593.95,1902.14 ; J3.25@3516.39,1888.57 J3.26@3593.95,1875 ; J3.25@3516.39,1888.57 J3.26@3595.13,1888.57 ; J3.26@3595.13,1888.57 3517.57,1875 J3.26@3595.13,1888.57 ; J3.26@3595.13,1888.57 3517.57,1902.14 J3.26@3595.13,1888.57
RS232_TXD2: J3.29 J3.30 U4.7 | length 4318.2
  TOP w20: U4.7@1996.72,365.95 1998.45,364.22 1998.45,252.31 v1(2095.76,155) 2042.33,208.43
  BOTTOM w20: J3.29@3507.77,1741.64 3457.77,1692.01 ; J3.29@3522.81,1719.08 3457.77,1692.01 ; J3.30@3591.63,1717.92 J3.29@3517.57,1744.66 ; J3.30@3591.63,1744.25 J3.29@3517.57,1717.52 ; J3.30@3593.95,1717.52 J3.29@3516.39,1731.09 ; J3.30@3593.95,1744.66 J3.29@3516.39,1731.09 ; J3.30@3596.31,1717.52 J3.29@3517.57,1717.52 ; J3.30@3596.31,1744.66 J3.29@3517.57,1744.66 ; v1(2095.76,155) 2110.4,155 ; v1(2095.76,155) 2155.4,110 ; v1(2095.76,155) 2110.4,155 ; 2110.4,155 2155.4,110 ; 2155.4,110 3361.83,110 3457.77,205.94 3457.77,1692.01 ; 3457.77,1692.01 J3.29@3516.39,1731.09 ; 3457.77,1692.01 3496.85,1731.09 J3.29@3516.39,1731.09 ; J3.29@3516.39,1731.09 J3.30@3595.13,1731.09 ; J3.29@3517.57,1717.52 J3.30@3595.13,1731.09 ; J3.29@3517.57,1744.66 J3.30@3595.13,1731.09
RX+: J2.19 J2.20 R34.1 U8.4 | length 4188.4
  TOP w8: J2.20@161.39,1697.3 J2.19@240.13,1697.3 307.39,1697.3 688.16,1316.53 688.16,122.6 720.76,90 1155.76,90 1172.32,106.56 1172.32,187.81 ; J2.20@162.81,1685.76 209.01,1697.3 ; J2.20@162.81,1708.83 209.01,1697.3 ; J2.20@165.43,1678.1 209.01,1697.3 ; J2.20@165.43,1716.5 209.01,1697.3 ; J2.19@236.09,1678.1 192.51,1697.3 ; J2.19@236.09,1716.5 192.51,1697.3 ; J2.19@238.71,1685.76 192.51,1697.3 ; J2.19@238.71,1708.83 192.51,1697.3 ; J2.19@241.55,1685.76 287.75,1697.3 ; J2.19@241.55,1708.83 287.75,1697.3 ; J2.19@244.17,1678.1 287.75,1697.3 ; J2.19@244.17,1716.5 287.75,1697.3 ; R34.1@1118.09,234.83 1159.4,282.02 ; R34.1@1123.9,207.99 1172.32,187.81 ; R34.1@1124.48,229.92 1159.4,282.02 ; R34.1@1127.57,215.19 1172.32,187.81 ; R34.1@1143.67,231.76 1172.32,187.81 ; R34.1@1145.76,220.8 1159.4,282.02 ; R34.1@1150.76,235.64 1172.32,187.81 ; R34.1@1153.72,219.56 1159.4,282.02 ; 1159.4,324.84 U8.4@1159.4,353.84 ; U8.4@1159.4,368.84 1159.4,248.01 ; R34.1@1134.7,224.37 1159.4,248.01 ; R34.1@1134.7,224.37 1159.4,282.02 ; R34.1@1134.7,224.37 1172.32,187.81 ; R34.1@1134.7,224.37 1159.4,248.01 ; 1159.4,248.01 1144.04,217.46 1159.4,248.01 ; 1159.4,248.01 1128.21,234.01 1159.4,248.01 ; 1159.4,248.01 1151.76,214.68 1159.4,248.01 ; 1159.4,248.01 1125.77,241.84 1159.4,248.01 ; 1159.4,248.01 1135.76,224.37 1172.32,187.81
RX-: J2.17 J2.18 R35.1 U8.5 | length 3860.4
  TOP w8: J2.18@161.39,1618.56 J2.17@240.13,1618.56 ; J2.18@162.81,1607.02 209.01,1618.56 ; J2.18@162.81,1630.09 209.01,1618.56 ; J2.18@165.43,1599.36 209.01,1618.56 ; J2.18@165.43,1637.76 209.01,1618.56 ; J2.17@236.09,1599.36 192.51,1618.56 ; J2.17@236.09,1637.76 192.51,1618.56 ; J2.17@238.71,1607.02 192.51,1618.56 ; J2.17@238.71,1630.09 192.51,1618.56 ; J2.17@238.85,1630.11 290.78,1630 ; J2.17@239.5,1638.17 290.78,1630 ; J2.17@243.94,1607.58 290.78,1630 ; J2.17@247.99,1600.58 290.78,1630 ; 1179.09,324.84 U8.5@1179.09,353.84 ; U8.5@1179.09,368.84 1179.09,256.04 ; R35.1@1206.16,236.19 1185.32,192.26 ; R35.1@1207.43,211.03 1179.09,256.04 ; R35.1@1213.16,232.12 1185.32,192.26 ; R35.1@1213.92,215.84 1179.09,256.04 ; R35.1@1227.68,234.41 1179.09,256.04 ; R35.1@1228.4,214.79 1185.32,192.26 ; R35.1@1230.4,242.02 1179.09,256.04 ; R35.1@1231.54,207.32 1185.32,192.26 ; J2.17@240.13,1618.56 290.78,1630 ; J2.17@240.13,1618.56 251.57,1630 355.76,1630 675.16,1310.6 675.16,117.22 715.38,77 1161.14,77 1185.32,101.17 1185.32,192.26 ; 1179.09,256.04 1221.82,224.37 1185.32,192.26 ; 1179.09,256.04 1210.76,224.37 1217.43,224.37 1185.32,192.26
RXCLK+: J4.15 U12.39 | length 1564
  TOP w8: v4@2169.8,4329.06 2178.59,4290.89 ; J4.15@2171.8,4274.53 2178.59,4308.69 ; J4.15@2178.59,4265 2178.59,4327.83 v4(2180.76,4330) 2178.59,4290.89 ; J4.15@2178.59,4273.86 2178.59,4308.69 ; J4.15@2185.39,4274.53 2178.59,4308.69 ; v4@2191.55,4327.86 2178.59,4290.89 ; U12.39@2422.51,3950.52 2422.51,4106.75 ; U12.39@2422.51,3977.68 2422.51,4007 ; v4@2441.98,4141.63 2422.51,4106.75 ; v4@2457.39,4126.22 2422.51,4106.75 ; 2422.51,4106.75 v4(2450.76,4135) 2422.51,4106.75
  BOTTOM w8: v4@2170.03,4327.58 2180.76,4305 ; v4(2180.76,4330) 2180.76,4305 ; v4@2191.49,4327.58 2180.76,4305 ; v4@2441.15,4140.35 2424.06,4098.3 ; v4@2458.81,4127.5 2424.06,4098.3 ; 2180.76,4305 2163.76,4288 2108.76,4288 2060.76,4240 2060.76,4110 2104.76,4066 2391.76,4066 2450.76,4125 v4(2450.76,4135) 2424.06,4098.3
RXCLK-: J4.14 U12.40 | length 2073.8
  TOP w8: v4@2204.78,4324.28 J4.14@2212.97,4283.55 ; v4@2205.29,4321.64 2222.42,4286.3 ; J4.14@2211.17,4274.53 2217.96,4308.69 ; J4.14@2217.96,4265 2217.96,4322.8 v4(2215.76,4325) ; J4.14@2217.96,4273.86 2217.96,4308.69 ; J4.14@2224.76,4274.53 2217.96,4308.69 ; v4@2226.54,4322.81 J4.14@2212.97,4283.55 ; v4@2226.76,4325.33 2222.42,4286.3 ; U12.40@2402.83,3950.52 2402.83,4137.07 v4(2415.76,4150) 2402.83,4106.82 ; U12.40@2402.83,3977.68 2402.83,4007 ; v4@2404.92,4151.85 2402.83,4106.82 ; v4@2425.83,4145.58 2402.83,4106.82 ; v4@2205.98,4319.97 2217.96,4308.69 ; v4@2205.98,4319.97 2217.96,4308.69 ; v4@2205.98,4319.97 2217.96,4308.69 ; J4.14@2212.97,4283.55 v4(2215.76,4325) ; v4(2215.76,4325) 2217.96,4285.92 ; v4(2215.76,4325) 2217.96,4308.69 ; v4(2215.76,4325) 2217.96,4308.69 ; v4(2215.76,4325) 2222.42,4286.3 ; v4(2215.76,4325) 2217.96,4308.69 ; v4(2215.76,4325) 2217.96,4285.89 ; 2217.96,4285.92 2204.97,4322.84 2217.96,4285.89 ; 2217.96,4285.92 2226.72,4324.07 2217.96,4285.89 ; 2217.96,4308.69 v4@2226.53,4322.75 ; 2217.96,4308.69 v4@2226.53,4322.75 ; 2217.96,4308.69 v4@2226.53,4322.75
  BOTTOM w8: v4@2204.83,4326.22 2205.76,4285 ; v4@2225.98,4320.93 2205.76,4285 ; v4@2405.03,4147.58 2415.76,4125 ; v4@2426.49,4147.58 2415.76,4125 ; 2205.76,4285 v4(2215.76,4325) 2205.76,4315 2205.76,4285 ; 2205.76,4285 2195.76,4275 2114.14,4275 2075.76,4236.62 2075.76,4115 2111.76,4079 2369.76,4079 2415.76,4125 ; 2415.76,4125 v4(2415.76,4150) 2415.76,4125
RXIN0+: J4.6 U12.47 | length 1848.2
  TOP w8: v4@2212.84,4172.37 2247.54,4144.28 ; v4@2230.31,4185.46 2247.54,4144.28 ; U12.47@2265.03,3950.52 2265.03,4126.79 2220.76,4171.06 v4(2220.76,4180) 2247.54,4144.28 ; U12.47@2265.03,3977.68 2265.03,4007 ; v4@2524.77,4325.5 2528.49,4286.4 ; v4@2524.95,4322.97 J4.6@2538.23,4282.03 ; J4.6@2526.13,4274.53 2532.93,4308.69 ; J4.6@2532.93,4265 2532.93,4327.17 2535.76,4330 v4(2535.76,4325) ; J4.6@2532.93,4273.86 2532.93,4308.69 ; J4.6@2539.72,4274.53 2532.93,4308.69 ; v4@2546.18,4321.47 2528.49,4286.4 ; v4@2546.73,4324.22 J4.6@2538.23,4282.03 ; v4@2524.91,4323.18 2532.93,4308.69 ; v4@2524.91,4323.18 2532.93,4308.69 ; v4@2524.91,4323.18 2532.93,4308.69 ; 2528.49,4286.4 v4(2535.76,4325) ; 2532.93,4285.87 v4(2535.76,4325) ; 2532.93,4285.87 2524.79,4324.25 2532.93,4285.87 ; 2532.93,4285.87 2546.51,4322.68 2532.93,4285.87 ; 2532.93,4285.87 v4(2535.76,4325) ; 2532.93,4308.69 v4(2535.76,4325) ; 2532.93,4308.69 v4@2545.36,4319.62 ; 2532.93,4308.69 v4(2535.76,4325) ; 2532.93,4308.69 v4@2545.36,4319.62 ; 2532.93,4308.69 v4(2535.76,4325) ; 2532.93,4308.69 v4@2545.36,4319.62 ; v4(2535.76,4325) J4.6@2538.23,4282.03
  BOTTOM w8: v4@2212.86,4187.65 2235.38,4203 ; v4@2231.04,4176.1 2235.38,4203 ; v4@2524.87,4323.45 2535.76,4286 v4@2546.65,4323.45 ; v4(2535.76,4325) 2535.76,4215 2523.76,4203 2235.38,4203 ; 2235.38,4203 v4(2220.76,4180) 2220.76,4171.06 2215.76,4176.06 2215.76,4190 2222.38,4190 2235.38,4203
RXIN0-: J4.5 U12.48 | length 1336.5
  TOP w8: v4(2180.76,4155) 2202.88,4155 ; v4@2183.5,4144.35 2202.88,4155 ; v4@2183.5,4165.65 2202.88,4155 ; U12.48@2245.35,3950.52 2245.35,4112.53 2202.88,4155 ; U12.48@2245.35,3977.68 2245.35,4007 ; v4@2559.94,4333.03 2572.3,4295.95 ; J4.5@2565.5,4274.53 2572.3,4308.69 ; J4.5@2572.3,4265 2572.3,4333.46 v4(2570.76,4335) 2572.3,4295.95 ; J4.5@2572.3,4273.86 2572.3,4308.69 ; J4.5@2579.09,4274.53 2572.3,4308.69 ; v4@2581.7,4333.88 2572.3,4295.95
  BOTTOM w8: v4(2180.76,4155) 2229.7,4155 2244.76,4170.06 2244.76,4172.94 2261.82,4190 2530.76,4190 2565.76,4225 2565.76,4330 v4(2570.76,4335) 2565.76,4295.11 ; v4@2182.31,4144.11 2219.76,4155 v4@2182.31,4165.89 ; v4@2559.76,4334.86 2565.76,4295.11 ; v4@2581.38,4332.15 2565.76,4295.11
RXIN1+: J4.9 U12.45 | length 1885.5
  TOP w8: v4@2301.23,4165.5 2295.76,4145 ; U12.45@2304.4,3950.52 2304.4,3986.86 ; v4@2316.26,4150.47 2295.76,4145 ; v4@2404.76,4324.99 2410.31,4286.03 ; v4@2405.05,4322.48 2419.5,4285.15 ; J4.9@2408.02,4274.53 2414.82,4308.69 ; J4.9@2414.82,4265 2414.82,4324.06 v4(2415.76,4325) ; J4.9@2414.82,4273.86 2414.82,4308.69 ; J4.9@2421.61,4274.53 2414.82,4308.69 ; v4@2426.33,4321.97 2410.31,4286.03 ; v4@2426.75,4324.51 2419.5,4285.15 ; 2295.76,3995.5 U12.45@2304.4,3977.68 ; 2295.76,3995.5 2304.4,3986.86 ; 2295.76,3995.5 2295.76,4145 ; 2295.76,4145 v4(2310.76,4160) 2295.76,4145 ; U12.45@2304.4,3977.68 2304.4,3986.86 ; U12.45@2304.4,3977.68 2304.4,3986.86 ; v4@2405.2,4321.9 2414.82,4308.69 ; v4@2405.2,4321.9 2414.82,4308.69 ; v4@2405.2,4321.9 2414.82,4308.69 ; 2410.31,4286.03 v4(2415.76,4325) ; 2414.82,4285.99 v4(2415.76,4325) ; 2414.82,4285.99 2404.84,4323.71 2414.82,4285.98 ; 2414.82,4285.99 2426.61,4323.19 2414.82,4285.98 ; 2414.82,4285.98 v4(2415.76,4325) ; 2414.82,4308.69 v4(2415.76,4325) ; 2414.82,4308.69 v4@2425.89,4320.71 ; 2414.82,4308.69 v4(2415.76,4325) ; 2414.82,4308.69 v4@2425.89,4320.71 ; 2414.82,4308.69 v4(2415.76,4325) ; 2414.82,4308.69 v4@2425.89,4320.71 ; v4(2415.76,4325) 2419.5,4285.15
  BOTTOM w8: v4@2300.03,4157.58 2310.76,4135 ; v4@2321.49,4157.58 2310.76,4135 ; v4@2404.87,4323.45 2415.76,4286 v4@2426.65,4323.45 ; v4(2415.76,4325) 2415.76,4275 2375.76,4235 2175.76,4235 2140.76,4200 2140.76,4140 2162.76,4118 2293.76,4118 2310.76,4135 ; 2310.76,4135 v4(2310.76,4160) 2310.76,4135
RXIN1-: J4.8 U12.46 | length 1843.6
  TOP w8: v4@2262.49,4157.74 2282.76,4143 ; v4@2281.34,4168.02 2282.76,4143 ; U12.46@2284.72,3950.52 2284.72,3985 ; v4@2444.76,4325.16 2449.71,4286.18 ; v4@2445.01,4322.65 J4.8@2458.99,4284.54 ; J4.8@2447.39,4274.53 2454.19,4308.69 ; J4.8@2454.19,4265 2454.19,4326.57 v4(2455.76,4325) ; J4.8@2454.19,4273.86 2454.19,4308.69 ; J4.8@2460.98,4274.53 2454.19,4308.69 ; v4@2466.28,4321.8 2449.71,4286.18 ; v4@2466.74,4324.38 J4.8@2458.99,4284.54 ; 2282.76,3986.96 U12.46@2284.72,3977.68 ; 2282.76,3986.96 2284.72,3985 ; 2282.76,3986.96 2282.76,4143 ; 2282.76,4143 v4(2270.76,4165) 2260.76,4165 2282.76,4143 ; U12.46@2284.72,3977.68 2284.72,3985 ; U12.46@2284.72,3977.68 2284.72,3985 ; v4@2445.09,4322.32 2454.19,4308.69 ; v4@2445.09,4322.32 2454.19,4308.69 ; v4@2445.09,4322.32 2454.19,4308.69 ; 2449.71,4286.18 v4(2455.76,4325) ; 2454.19,4285.96 v4(2455.76,4325) ; 2454.19,4285.96 2444.82,4323.89 2454.19,4285.96 ; 2454.19,4285.96 2466.58,4323.01 2454.19,4285.96 ; 2454.19,4285.96 v4(2455.76,4325) ; 2454.19,4308.69 v4(2455.76,4325) ; 2454.19,4308.69 v4@2465.72,4320.33 ; 2454.19,4308.69 v4(2455.76,4325) ; 2454.19,4308.69 v4@2465.72,4320.33 ; 2454.19,4308.69 v4(2455.76,4325) ; 2454.19,4308.69 v4@2465.72,4320.33 ; v4(2455.76,4325) J4.8@2458.99,4284.54
  BOTTOM w8: v4@2260.18,4161.97 2270.76,4145 ; v4@2281.34,4161.97 2270.76,4145 ; v4@2444.87,4323.45 2455.76,4286 v4@2466.65,4323.45 ; v4(2455.76,4325) 2455.76,4265 2412.76,4222 2187.76,4222 2155.76,4190 2155.76,4146.06 2170.82,4131 2256.76,4131 2270.76,4145 ; 2270.76,4145 v4(2270.76,4165) 2270.76,4145
RXIN2+: J4.12 U12.41 | length 1863
  TOP w8: v4@2284.76,4315.01 J4.12@2290.22,4276.1 ; v4@2285.35,4311.45 J4.12@2303.12,4276.42 ; J4.12@2289.91,4274.53 v4@2296.7,4308.69 ; J4.12@2296.7,4265 2296.7,4314.06 v4(2295.76,4315) ; J4.12@2296.7,4273.86 v4@2296.7,4308.69 ; J4.12@2303.5,4274.53 v4@2296.7,4308.69 ; v4@2306.33,4311.94 J4.12@2290.22,4276.1 ; v4@2306.75,4315.53 J4.12@2303.12,4276.42 ; v4@2369.98,4152.8 2383.14,4115.84 ; U12.41@2383.14,3950.52 2383.14,4155 v4(2380.76,4155) 2383.14,4115.84 ; U12.41@2383.14,3977.68 2383.14,4007 ; v4@2391.72,4154.12 2383.14,4115.84 ; J4.12@2290.22,4276.1 v4(2295.76,4315) ; v4(2295.76,4315) J4.12@2296.7,4275.98 ; v4(2295.76,4315) J4.12@2303.12,4276.42 ; v4(2295.76,4315) J4.12@2296.7,4275.98 ; J4.12@2296.7,4275.98 2284.91,4313.19 J4.12@2296.7,4275.98 ; J4.12@2296.7,4275.98 2306.68,4313.71 J4.12@2296.7,4275.98
  BOTTOM w8: v4@2284.87,4313.45 2295.76,4276 v4@2306.65,4313.45 ; v4(2295.76,4315) 2295.76,4270 2287.76,4262 2127.76,4262 2105.76,4240 2105.76,4106.62 2120.38,4092 2350.79,4092 2380.76,4121.97 ; v4@2369.91,4153.17 2380.76,4121.97 ; v4@2391.61,4153.17 2380.76,4121.97 ; 2380.76,4121.97 v4(2380.76,4155) 2380.76,4121.97
RXIN2-: J4.11 U12.42 | length 1964.7
  TOP w8: v4@2324.77,4324.66 2331.47,4285.55 ; v4@2325.14,4322.14 2340.62,4285.83 ; J4.11@2329.28,4274.53 2336.07,4308.69 ; J4.11@2336.07,4265 2336.07,4324.69 v4(2335.76,4325) ; J4.11@2336.07,4273.86 2336.07,4308.69 ; v4@2338.54,4131.7 2363.46,4117.3 ; J4.11@2342.87,4274.53 2336.07,4308.69 ; v4@2346.43,4322.31 2331.47,4285.55 ; v4@2346.76,4324.82 2340.62,4285.83 ; v4@2355.57,4144.98 2363.46,4117.3 ; U12.42@2363.46,3950.52 2363.46,4117.3 ; U12.42@2363.46,3977.68 2363.46,4007 ; v4@2325.48,4321.09 2336.07,4308.69 ; v4@2325.48,4321.09 2336.07,4308.69 ; v4@2325.48,4321.09 2336.07,4308.69 ; 2331.47,4285.55 v4(2335.76,4325) ; v4(2335.76,4325) 2336.07,4286 ; v4(2335.76,4325) 2336.07,4308.69 ; v4(2335.76,4325) 2336.07,4308.69 ; v4(2335.76,4325) 2340.62,4285.83 ; v4(2335.76,4325) 2336.07,4308.69 ; v4(2335.76,4325) 2336.07,4286 ; 2336.07,4286 2324.88,4323.36 2336.07,4286 ; 2336.07,4286 2346.66,4323.54 2336.07,4286 ; 2336.07,4308.69 v4@2346.19,4321.49 ; 2336.07,4308.69 v4@2346.19,4321.49 ; 2336.07,4308.69 v4@2346.19,4321.49 ; 2363.46,4117.3 v4(2345.76,4140) 2345.76,4135 2363.46,4117.3
  BOTTOM w8: v4@2324.87,4323.45 2335.76,4286 v4@2346.65,4323.45 ; v4(2335.76,4325) 2335.76,4265 2319.76,4249 2134.76,4249 2118.76,4233 2118.76,4112 2125.76,4105 2310.76,4105 v4(2345.76,4140) 2313.79,4108.03 ; v4@2337.09,4146.77 2313.79,4108.03 ; v4@2352.53,4131.33 2313.79,4108.03
SIM_DET: CON10.54
SPEED: U8.29
STM_LCD_ONOFF: J3.15 J3.16 R51.1 | length 2898.9
  TOP w8: R51.1@3315.33,3908.73 3295.76,3865.43 ; v4@3321.11,3299.72 3304.81,3340.95 ; R51.1@3322.36,3904.8 3295.76,3865.43 ; R51.1@3328.36,3900 3295.76,3865.43 ; R51.1@3330.33,3900 3295.76,3865.43 ; R51.1@3333.5,3894.29 3295.76,3865.43 ; R51.1@3337.84,3887.5 3295.76,3865.43 ; v4@3338.81,3312.49 3304.81,3340.95 ; 3295.76,3865.43 3295.76,3350 3330.76,3315 v4(3330.76,3305) 3304.81,3340.95
  BOTTOM w8: v4@3321.62,3311.12 3310.76,3285 ; v4(3330.76,3305) 3310.76,3285 ; v4@3336.88,3295.86 3310.76,3285 ; J3.15@3512.35,2263.07 3468.77,2282.27 ; J3.15@3512.35,2301.47 3468.77,2282.27 ; J3.15@3514.97,2270.73 3468.77,2282.27 ; J3.15@3514.97,2293.8 3468.77,2282.27 ; J3.15@3517.81,2270.73 3564.01,2282.27 ; J3.15@3517.81,2293.8 3564.01,2282.27 ; J3.15@3520.43,2263.07 3564.01,2282.27 ; J3.15@3520.43,2301.47 3564.01,2282.27 ; J3.16@3591.09,2263.07 3547.51,2282.27 ; J3.16@3591.09,2301.47 3547.51,2282.27 ; J3.16@3593.71,2270.73 3547.51,2282.27 ; J3.16@3593.71,2293.8 3547.51,2282.27 ; J3.16@3595.13,2282.27 J3.15@3516.39,2282.27 ; 3310.76,3285 3310.76,2985 3400.76,2895 3400.76,2340 3458.49,2282.27 J3.15@3516.39,2282.27 ; 3468.77,2282.27 J3.15@3516.39,2282.27
STM_LCD_PWM: J3.17 J3.18 R52.1 | length 2920
  TOP w8: v4@3271.87,3309.55 3282.76,3347 v4@3293.65,3309.55 ; v4(3282.76,3308) 3282.76,3912 3330.33,3959.57 R52.1@3330.33,3960 ; R52.1@3315.37,3968.8 3293.98,3923.22 ; R52.1@3322.36,3964.8 3293.98,3923.22 ; R52.1@3328.36,3960 3293.98,3923.22 ; R52.1@3333.56,3954.34 3293.98,3923.22 ; R52.1@3338.01,3947.64 3293.98,3923.22
  BOTTOM w8: v4@3271.87,3306.45 3282.76,3269 v4@3293.65,3306.45 ; v4(3282.76,3308) 3282.76,2988 3350.76,2920 3387.76,2883 3387.76,2293 3477.23,2203.53 ; J3.17@3511.47,2184.53 3477.23,2203.53 ; J3.17@3511.47,2222.53 3477.23,2203.53 ; J3.17@3514.67,2192.04 3477.23,2203.53 ; J3.17@3514.67,2215.02 3477.23,2203.53 ; J3.17@3517.81,2191.99 3564.01,2203.53 ; J3.17@3517.81,2215.06 3564.01,2203.53 ; J3.17@3520.43,2184.33 3564.01,2203.53 ; J3.17@3520.43,2222.73 3564.01,2203.53 ; J3.18@3591.09,2184.33 3547.51,2203.53 ; J3.18@3591.09,2222.73 3547.51,2203.53 ; J3.18@3593.71,2191.99 3547.51,2203.53 ; J3.18@3593.71,2215.06 3547.51,2203.53 ; J3.18@3595.13,2203.53 J3.17@3516.39,2203.53 3477.23,2203.53
TP1_EN: CON12.50 R22.1 | length 3066
  TOP w6: v2@1758.81,3084.17 1783.61,3070.57 ; v2(1763.61,3090.57) 1783.61,3070.57 ; v2@1770.01,3095.37 1783.61,3070.57 ; CON12.50@1779.01,2977.98 1779.01,3041.65 1783.61,3046.26 1783.61,3070.57 ; CON12.50@1779.01,3000.48 1779.01,3023.48 ; v2(2278.61,3170.57) 2514.72,3170.57 2642.15,3298 2935.38,3298 3032.76,3395.38 3032.76,3492 3055.76,3515 v1@3130.76,3515 ; v2@2279.72,3162.65 2307.61,3170.57 v2@2279.72,3178.49 ; v1@3127.47,3497.71 3098.84,3515 ; v1@3132.22,3512.87 3098.84,3515 ; v1@3135.76,3510 v1(3130.76,3505) 3098.84,3515 ; v1(3175.76,3605) R22.1@3175.76,3605.43
  BOTTOM w6: v2@1758.67,3084.28 1787.34,3066.84 v2@1769.9,3095.51 ; v2(1763.61,3090.57) 1798.61,3055.57 1798.61,2745.57 1858.61,2685.57 2063.61,2685.57 2143.61,2765.57 2143.61,3035.57 v2(2278.61,3170.57) 2254.89,3146.84 ; v2@2272.32,3175.51 2254.89,3146.84 ; v2@2283.56,3164.28 2254.89,3146.84 ; v1@3122.84,3506.1 3130.76,3534 v1@3138.68,3506.1 ; v1(3130.76,3505) 3130.76,3595 3140.76,3605 v1(3175.76,3605) ; v1@3174.66,3597.08 3146.76,3605 v1@3174.66,3612.92
TP1_INT: CON12.48 U2.4 | length 2861.7
  TOP w6: v1@1669.25,3449.65 1658.61,3427.85 ; v1@1680.41,3438.49 1658.61,3427.85 ; CON12.48@1798.69,2977.98 1798.69,3093.53 1718.61,3173.6 1718.61,3240.57 1658.61,3300.57 1658.61,3427.85 ; CON12.48@1798.69,3000.48 1798.69,3023.48 ; 1658.61,3427.85 v1(1675.76,3445) 1658.61,3427.85
  TOP w10: v1(2460.76,3295) 2460.76,3290.3 2487.06,3264 2574.21,3264 2632.21,3322 2877.76,3322 2941.23,3385.47 U2.4@2960.72,3385.47 2910.15,3354.39
  BOTTOM w10: v1(1675.76,3445) 1910.76,3445 1950.76,3485 2005.46,3485 2071.76,3551.3 2071.76,3636.5 2224.26,3789 2459.84,3789 2475.76,3773.08 2475.76,3394.7 2474.76,3393.7 2474.76,3376.3 2475.76,3375.3 2475.76,3310 ; v1@1676.2,3439.02 1716.76,3445 v1@1676.2,3450.98 ; v1@2457.16,3299.8 2475.76,3310 ; v1(2460.76,3295) 2475.76,3310 ; v1@2465.56,3291.4 2475.76,3310
TP_IOCTL: CON12.53 U9.47 | length 2375.9
  TOP w6: v1@1520.82,3396.29 1549.49,3413.73 v1@1532.05,3385.06 ; v1(1525.76,3390) 1555.76,3420 1623.89,3420 1717.89,3514 1854.76,3514 1880.3,3539.54 U9.47@1880.3,3650 ; v2@1730.78,2647.21 1738.61,2665.07 ; v2(1738.61,2645.57) 1738.61,2665.07 ; 1739.64,2814.36 CON12.53@1739.64,2837.36 ; CON12.53@1739.64,2859.86 1739.64,2666.1 1738.61,2665.07 ; v2@1746.44,2647.21 1738.61,2665.07 ; 1880.3,3599.5 U9.47@1880.3,3623.5
  BOTTOM w6: v1@1523.57,3397.7 1495.53,3385.57 ; v1@1525.87,3382 1495.53,3385.57 ; v2@1736.93,2637.75 1719.61,2645.57 ; v2@1736.93,2653.39 1719.61,2645.57 ; 1495.53,3385.57 v1(1525.76,3390) 1521.33,3385.57 1303.61,3385.57 1209.26,3291.22 1209.26,3272.74 1208.61,3272.09 1208.61,2995.57 1563.61,2640.57 1714.61,2640.57 1719.61,2645.57 ; 1719.61,2645.57 v2(1738.61,2645.57) 1719.61,2645.57
TSC_IRQ: C40.1 U2.1 U5.4 | length 1609.9
  TOP w10: C40.1@2789.87,3464.37 2826.39,3485 ; C40.1@2795.76,3454.37 2826.39,3485 ; C40.1@2797.73,3454.37 2826.39,3485 ; C40.1@2808.22,3447.19 2826.39,3485 ; v1@2834.77,3874.72 2835.76,3917.61 ; v1@2846.66,3876.11 2835.76,3917.61 ; 2876.27,4060.32 U5.4@2912.18,4060.32 ; v1@2912.55,3479.93 2952.85,3457.91 ; v1@2915.32,3479.02 2874.76,3485 ; v1@2915.32,3490.98 2874.76,3485 ; v1@2919.61,3489.6 2952.85,3457.91 ; U5.4@2924.97,4060.32 2846.08,4060.32 2835.76,4050 2835.76,3880 v1(2840.76,3875) 2835.76,3917.61 ; 2826.39,3485 v1(2915.76,3485) ; 2874.76,3485 v1(2915.76,3485) ; v1(2915.76,3485) 2952.85,3457.91 ; v1(2915.76,3485) 2925.76,3485 2955.76,3455 ; 2955.76,3449.49 U2.1@2960.72,3444.53 ; 2955.76,3449.49 2955.76,3455 ; 2955.76,3449.49 U2.1@2960.72,3444.53 ; 2955.76,3455 U2.1@2960.72,3444.53
  BOTTOM w10: v1(2840.76,3875) 2835.76,3880 2835.76,3565 v1(2915.76,3485) 2883.55,3517.21 ; v1@2911.25,3481.05 2883.55,3517.21 ; v1@2919.71,3489.51 2883.55,3517.21
TSC_RST: U2.8 U5.5 | length 1156.7
  TOP w10: v1@2861.76,3855 2861.76,3883.7 2861.39,3884.07 2861.39,4040.63 U5.5@2924.97,4040.63 ; 2876.27,4040.63 U5.5@2912.18,4040.63 ; v1@3069.91,3478.66 U2.8@3080.8,3444.53 ; v1@3081.75,3480.34 U2.8@3080.8,3444.53 ; U2.8@3080.8,3444.53 v1(3075.76,3480) 3080.8,3474.96 U2.8@3080.8,3444.53
  BOTTOM w10: v1@2854.78,3854.56 2860.76,3814 ; v1@2860.76,3845 2860.76,3580 2960.76,3480 v1(3075.76,3480) ; v1(2860.76,3855) 2860.76,3814 ; v1@2866.74,3854.56 2860.76,3814 ; v1@3075.32,3474.02 3034.76,3480 v1@3075.32,3485.98